# Altium PCB IOT_Fire_Alarm.PcbDoc
Units mil, origin at the board's own origin, x right, y up, seen from the top; angles counter-clockwise.
Board outline 4250 x 3345 mil, 2 copper layers (Top Layer, Bottom Layer); 48 components, 38 nets, 186 pads, 1 vias.
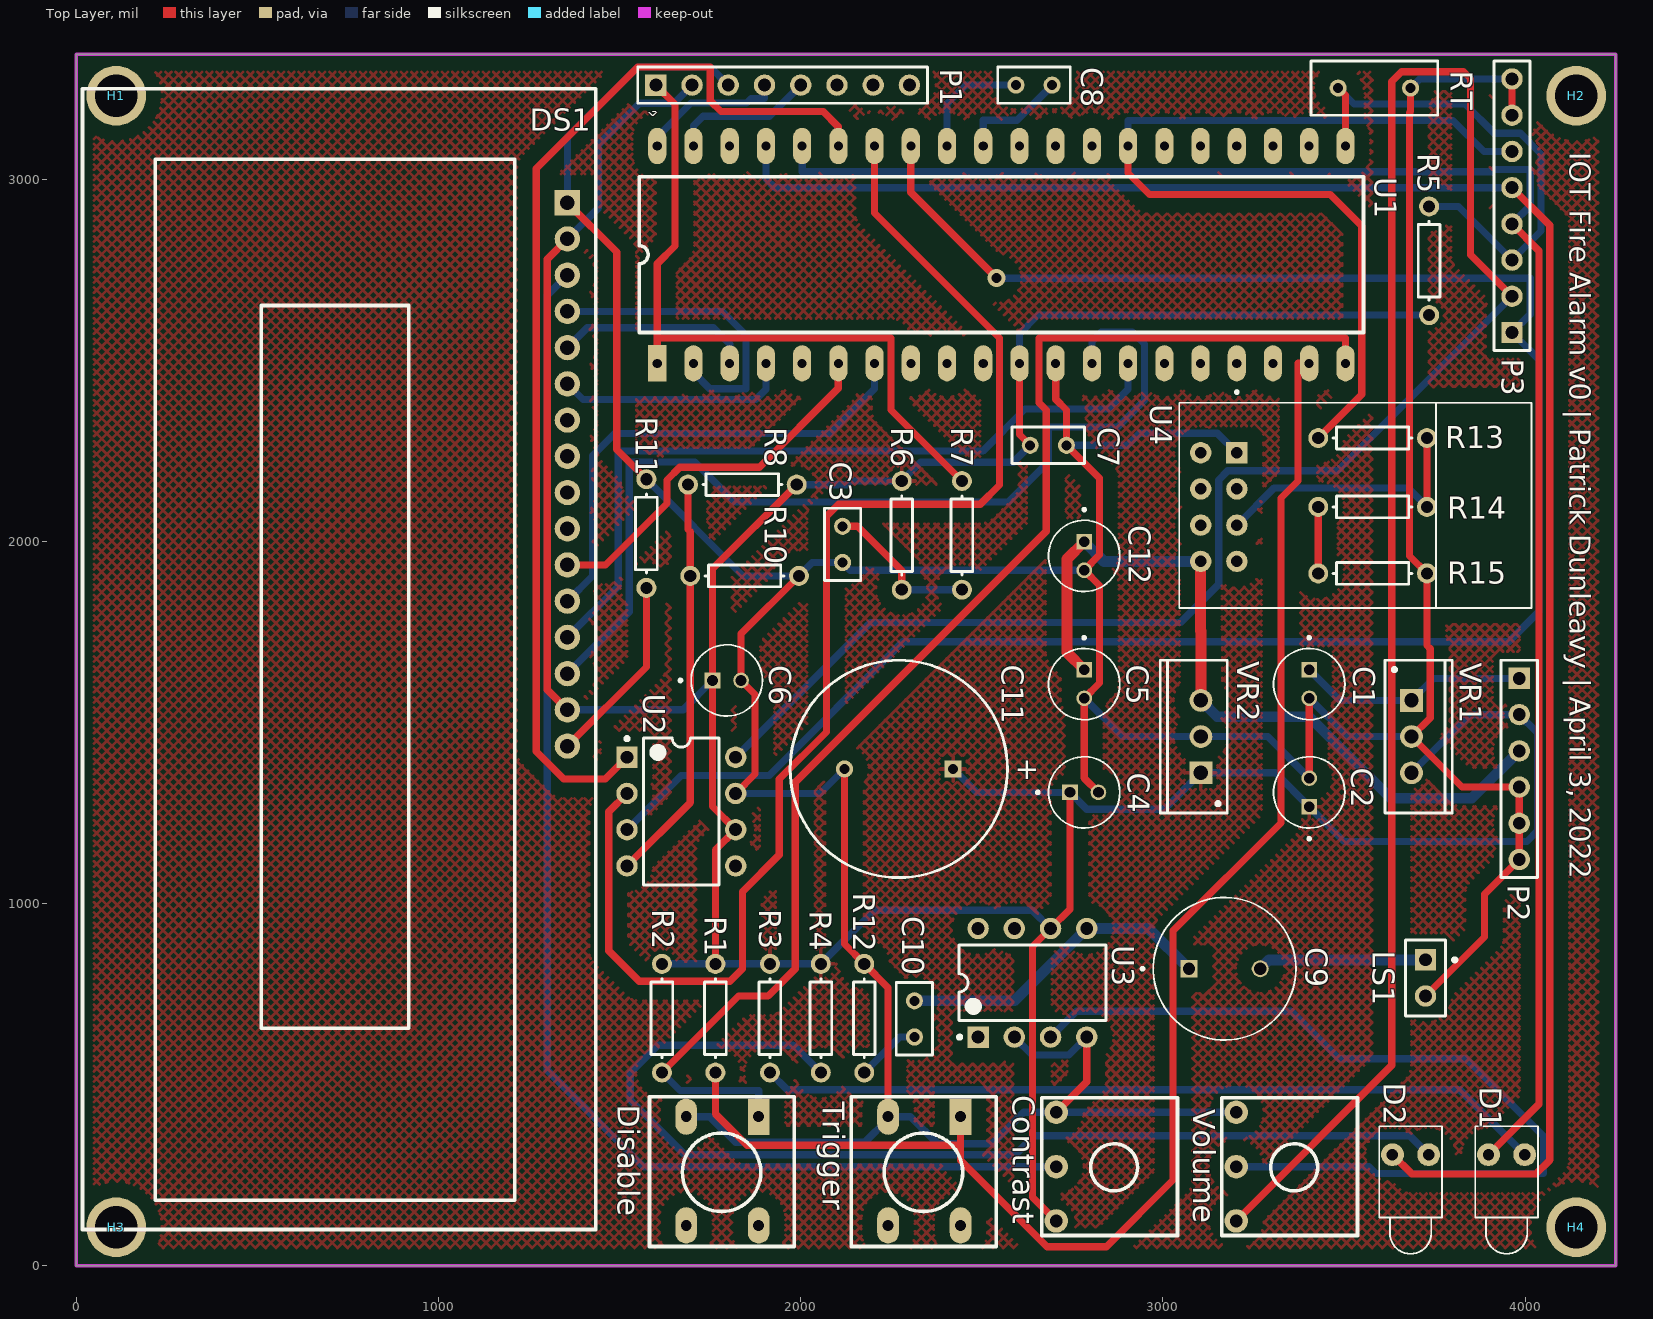
[diagram p0: Top Layer view]
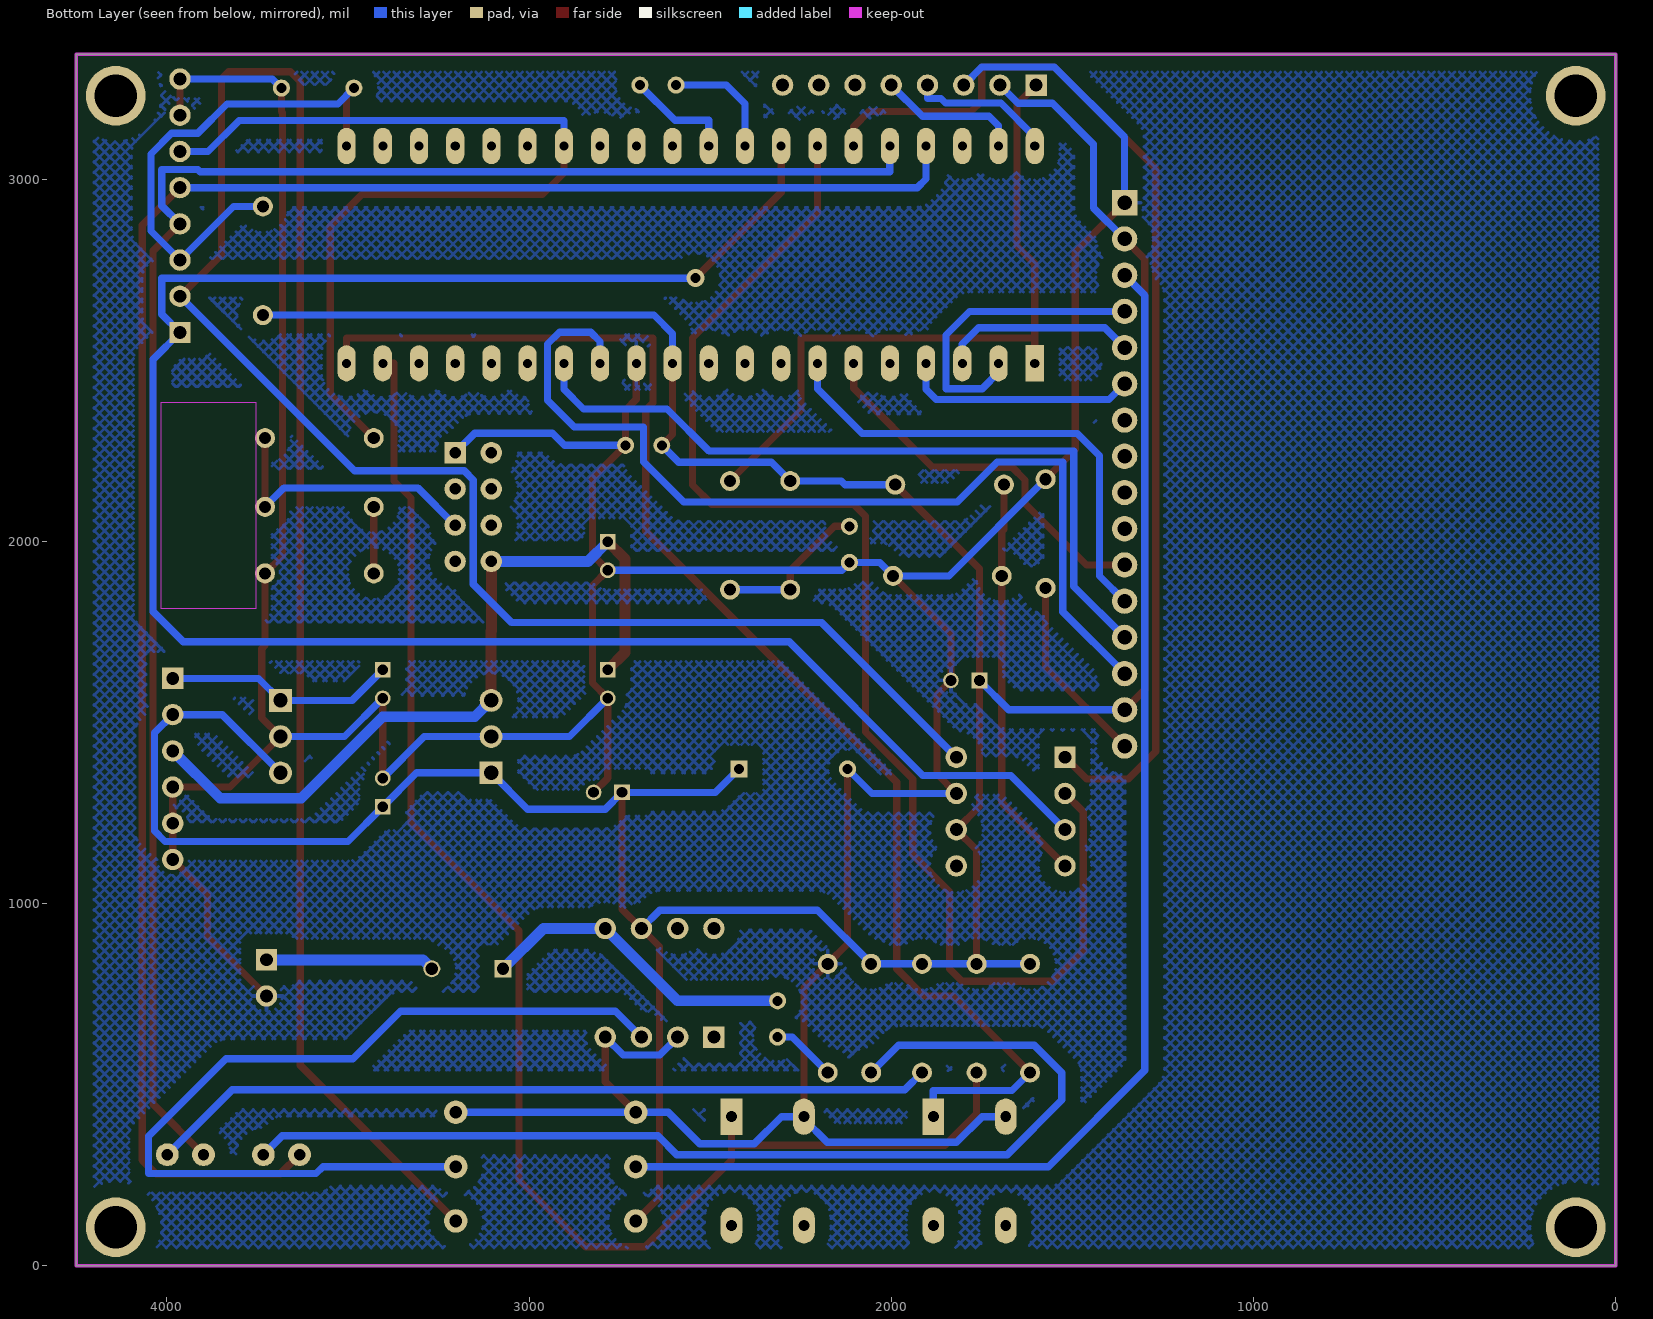
[diagram p1: Bottom Layer view, seen from below]

## Layer stack, top to bottom
Top Solder: solder mask 0.4, Solder Resist, Dk 3.5
Top Layer: signal copper 1.4
Dielectric 1: dielectric 12.6, FR-4, Dk 4.8
Bottom Layer: signal copper 1.4
Bottom Solder: solder mask 0.4, Solder Resist, Dk 3.5

## Board outline
0,0 4250,0 4250,3345 0,3345

## Design rules (kind name [scope] priority, off if disabled: settings)
Clearance Clearance_1 [InPolygon] p1: gap=40 ignorepadtopadclearanceinfootprint=FALSE
Clearance [All] p2: gap=10 ignorepadtopadclearanceinfootprint=FALSE except(0: Arc-Hole Track-Hole SMDPad-Hole THPad-Hole Via-Hole Fill-Hole Poly-Hole Region-Hole Text-Hole)
PolygonConnect [All] p1: connectstyle=Relief reliefconductorwidth=10 reliefentries=4 polygonreliefangle="90 Angle" airgapwidth=10
RoutingLayers [InNet('GND')] p1: top layer_v5=TRUE bottom layer_v5=TRUE
RoutingVias [All] p1: holewidth=28 width=50 viastyle="Through Hole" minholewidth=28 minwidth=50 maxholewidth=28 maxwidth=50
SolderMaskExpansion [All] p1: expansion=4 istentingtop=FALSE
Width "Schematic Width Constraint_2" [InNet('NetC9_N')] p1: maxlimit=30 minlimit=20 preferedwidth=30 minimp=50.000000 maximp=50.000000 favimp=50.000000
Width "Schematic Width Constraint_1" [InNet('NetC9_P')] p2: maxlimit=30 minlimit=20 preferedwidth=30 minimp=50.000000 maximp=50.000000 favimp=50.000000
Width "Schematic Width Constraint" [InNet('3V3')] p3: maxlimit=40 minlimit=20 preferedwidth=30 minimp=50.000000 maximp=50.000000 favimp=50.000000
Width [All] p4: maxlimit=20 minlimit=20 preferedwidth=20 minimp=50.000000 maximp=50.000000 favimp=50.000000
29 further rules are at their usual default settings.

## Components (designator, comment, footprint, x,y, rotation, side; value= is the part's Value field where it differs from the comment)
C1 "0.47uF" CAPPRD200W50D500H1500 3403.89,1606.31 r270 top
C2 "1uF" CAPPRD200W50D500H1500 3403.89,1307.3 r90 top
C3 "Cap" RAD-0.1 2115.58,1991.94 r90 top value="0.1 uF"
C4 "0.47uF" CAPPRD200W50D500H1500 2782.6,1307.3 r0 top
C5 "47uF" CAPPRD200W50D500H1500 2782.6,1606.31 r270 top
C6 "1uF" CAPPRD200W50D500H1500 1795.84,1616.37 r0 top
C7 "Cap" RAD-0.1 2683.66,2265.61 r180 top value=0.1uF
C8 "Cap" RAD-0.1 2644.15,3260 r180 top value=0.1uF
C9 "270uF" CAPPRD500W60D1000H1250 3170.22,820.33 r0 top
C10 "Cap" RAD-0.1 2313.89,681.94 r90 top value=0.1uF
C11 "Cap Pol1" RB7.6-15 2270.81,1371.94 r0 top value="1000 uF"
C12 "1uF" CAPPRD200W50D500H1500 2782.6,1960.05 r270 top
Contrast "RPot_3" "POT inline wide" 2705.2,374.01 r270 top value=10K
D1 "LED2" LED-1 3948.89,306.94 r270 top
D2 "LED2" LED-1 3683.69,306.94 r270 top
Disable "SW-PB" "SW PB" 1883.89,411.94 r270 top
DS1 "LCD 44780" "OLED 16x2" 1355.75,2935.24 r270 top
H1 "Hole 3mm" "Hole 3mm"#1 100.18,3245.6 r0 top
H2 "Hole 3mm" "Hole 3mm"#2 4141.25,3230.59 r0 top
H3 "Hole 3mm" "Hole 3mm"#3 110,105 r0 top
H4 "Hole 3mm" "Hole 3mm"#4 4140.29,106.85 r0 top
LS1 "Speaker" PIN2 3725,845 r270 top
P1 "Snap" HDR1X8 1600,3260 r0 top
P2 "Power" HDR1X6 3983.74,1621.94 r270 top
P3 "Debug" HDR1X8 3963.89,2576.94 r90 top
R1 "Res1" AXIAL-0.3 1764.37,683.83 r90 top value=1K
R2 "Res1" AXIAL-0.3 1616.76,683.83 r90 top value=1K
R3 "Res1" AXIAL-0.3 1915.02,683.83 r90 top value=2.2k
R4 "Res1" AXIAL-0.3 2055.5,683.83 r90 top value=2.2k
R5 "Res1" AXIAL-0.3 3735,2775 r270 top value=10K
R6 "Res1" AXIAL-0.3 2278.89,2016.94 r90 top value=10k
R7 "Res1" AXIAL-0.3 2445.15,2016.94 r90 top value=470
R8 "Res1" AXIAL-0.3 1838.89,2156.94 r180 top value=10K
R10 "Res1" AXIAL-0.3 1845,1905 r180 top value=470
R11 "Res1" AXIAL-0.3 1573.89,2021.94 r270 top value=1K
R12 "Res1" AXIAL-0.3 2175.39,683.83 r270 top value=10K
R13 "Res1" AXIAL-0.3 3578.89,2285.61 r180 top value=1K
R14 "Res1" AXIAL-0.3 3578.89,2095.54 r0 top value=1K
R15 "Res1" AXIAL-0.3 3578.89,1911.94 r180 top value=1K
RT "Res Thermal" RAD-0.2 3583.89,3251.94 r0 top (schematic designator RT1)
Trigger "SW-PB" "SW PB" 2441.2,411.94 r270 top
U1 "PIC18F47K40-I/P" DIP-40 1603.89,2491.94 r90 top
U2 "LT1661" DIP-8 1670.35,1254.37 r0 top
U3 "LM386N-1" DIP-8 2639.79,781.53 r90 top
U4 "ESP8266-01/ESP-01" XCVR_ESP8266-01/ESP-01 3531.4,2095.13 r270 top
Volume "RPot_3" "POT inline wide" 3202.32,374.01 r270 top value=10K
VR1 "LM7805CV" T03B 3686.42,1461.31 r270 top
VR2 "LM3940" T03B 3104.77,1461.31 r90 top

## Footprints (in the part's own frame and the unit in brackets; to place one, negate y for a bottom-side part, rotate by r counter-clockwise, add the part's x,y. Pads: shape width x height; smd on the part's side, far side on the other; paste and mask are expansions set on the pad)
AXIAL-0.3 [mm] "Axial Device, Thru-Hole; 2 Leads; 0.3 in Pin Spacing"
  round 1.4 hole 0.85: 1(-3.81,0) 2(3.81,0)
  silkscreen extent -2.77,-0.76 2.77,0.76
CAPPRD200W50D500H1500 [mm]
  round 1.1 hole 0.75: N(1,0)
  rect 1.1x1.1 hole 0.75: P(-1,0)
  silkscreen extent -3.35,-2.5 2.5,2.5, body extent -2.5,-2.5 2.5,2.5, height 15
CAPPRD500W60D1000H1250 [mm]
  round 1.2 hole 0.85: N(2.5,0)
  rect 1.2x1.2 hole 0.85: P(-2.5,0)
  silkscreen extent -5.85,-5 5,5, body extent -5,-5 5,5, height 12.5
DIP-8 [mm]
  rect 1.5x1.5 hole 0.9: 1(-3.81,3.81)
  round 1.5 hole 0.9: 2(-3.81,1.27) 3(-3.81,-1.27) 4(-3.81,-3.81) 5(3.81,-3.81) 6(3.81,-1.27) 7(3.81,1.27) 8(3.81,3.81)
  silkscreen extent -3.93,-5.15 2.65,5.23, body extent -3.6,-5.15 3.6,5.15, height 5.08
DIP-40 [mil]
  rect 100x50 hole 25: 1(0,0)
  oval 100x50 hole 25: 2(0,-100) 3(0,-200) 4(0,-300) 5(0,-400) 6(0,-500) 7(0,-600) 8(0,-700) 9(0,-800) 10(0,-900) 11(0,-1000) 12(0,-1100) 13(0,-1200) 14(0,-1300) 15(0,-1400) 16(0,-1500) 17(0,-1600) 18(0,-1700) 19(0,-1800) 20(0,-1900) 21(600,-1900) 22(600,-1800) 23(600,-1700) 24(600,-1600) 25(600,-1500) 26(600,-1400) 27(600,-1300) 28(600,-1200) 29(600,-1100) 30(600,-1000) 31(600,-900) 32(600,-800) 33(600,-700) 34(600,-600) 35(600,-500) 36(600,-400) 37(600,-300) 38(600,-200) 39(600,-100) 40(600,0)
  silkscreen extent 85,-1950 515,50
HDR1X6 [mm] "Connector; Header; 6 Position"
  rect 1.5x1.5 hole 0.9: 1(0,0)
  round 1.5 hole 0.9: 2(2.54,0) 3(5.08,0) 4(7.62,0) 5(10.16,0) 6(12.7,0)
  silkscreen extent -1.27,-1.27 13.97,1.27
HDR1X8 [mm] "Connector; Header; 8 Position"
  rect 1.5x1.5 hole 0.9: 1(0,0)
  round 1.5 hole 0.9: 2(2.54,0) 3(5.08,0) 4(7.62,0) 5(10.16,0) 6(12.7,0) 7(15.24,0) 8(17.78,0)
  silkscreen extent -1.27,-1.27 19.05,1.27
"Hole 3mm"#1 [mil]
  round 165 hole 118.11: 1(9.82,-15)
"Hole 3mm"#2 [mil]
  round 165 hole 118.11: 1(0,0)
"Hole 3mm"#3 [mil]
  round 165 hole 118.11: 1(0,1.85)
"Hole 3mm"#4 [mil]
  round 165 hole 118.11: 1(0.96,0)
LED-1 [mm] "LED; 2 Leads"
  round 1.6 hole 0.8: 1(0,1.27) 2(0,-1.27)
  silkscreen extent -2,-2.2 6.95,2.2
"OLED 16x2" [mil]
  rect 70x70 hole 40: 1(0,0)
  round 70 hole 40: 2(100,0) 3(200,0) 4(300,0) 5(400,0) 6(500,0) 7(600,0) 8(700,0) 9(800,0) 10(900,0) 11(1000,0) 12(1100,0) 13(1200,0) 14(1300,0) 15(1400,0) 16(1500,0)
  silkscreen extent -315,-1339 2835,79
PIN2 [mm] "Photosensitive Diode; 2 Leads"
  rect 1.5x1.5 hole 0.9: 1(0,0)
  round 1.5 hole 0.9: 2(2.54,0)
  silkscreen extent -1.4,-1.4 3.94,2.18
"POT inline wide" [mil]
  round 65 hole 35: 1(-50,0) 2(100,0) 3(250,0)
  silkscreen extent -90,-40 290,335
RAD-0.1 [mm] "Radial Cap, Thru-Hole; 2 Leads; 0.1 in Pin Spacing"
  round 1.2 hole 0.7: 1(-1.27,0) 2(1.27,0)
  silkscreen extent -2.54,-1.27 2.54,1.27
RAD-0.2 [mm] "Radial Cap, Thru-Hole; 2 Leads; 0.2 in Pin Spacing"
  round 1.2 hole 0.7: 1(-2.54,0) 2(2.54,0)
  silkscreen extent -4.44,-1.91 4.45,1.9
RB7.6-15 [mm] "Polarized Capacitor (Radial); 2 Leads"
  rect 1.2x1.2 hole 0.7: 1(3.81,0)
  round 1.2 hole 0.7: 2(-3.81,0)
  silkscreen extent -7.62,-7.62 7.62,7.62
"SW PB" [mil]
  rect 100x60 hole 30: 1(0,0)
  oval 100x60 hole 30: 2(0,-200) 3(300,-200) 4(300,0)
  silkscreen extent -55,-302 358,98
T03B [mm]
  rect 1.6x1.6 hole 1: 1(-2.54,0)
  round 1.6 hole 1: 2(0,0) 3(2.54,0)
  silkscreen extent -5.35,-1.85 5.35,2.85, body extent -5.4,-1.9 5.4,2.9, height 19.4
XCVR_ESP8266-01/ESP-01 [mm]
  rect 1.5x1.5 hole 0.8: 1(-3.81,-8.31)
  round 1.5 hole 0.8: 2(-1.27,-8.31) 3(1.27,-8.31) 4(3.81,-8.31) 5(-3.81,-10.85) 6(-1.27,-10.85) 7(1.27,-10.85) 8(3.81,-10.85)
  Keep-Out Layer region: 7.09,5.65 -7.31,5.65 -7.31,12.35 7.09,12.35
  Keep-Out Layer region: 7.09,5.65 -7.31,5.65 -7.31,12.35 7.09,12.35
  silkscreen extent -8.16,-12.35 7.09,12.35, body extent -7.2,-12.35 7.2,12.35, height 6.5

## Part data
C1 C2 C4 C5 C6 C12: library part EEUEB1J1R0, "1F 63V Aluminum Electrolytic Capacitors Radial, Can 5000 Hrs @ 105C", Package="RADIAL-2 Panasonic", Availability="Not in stock", Check_prices=https://www.snapeda.com/parts/EEU-EB1J1R0/Panasonic/view-part/6221748/?ref=eda, MF="Panasonic Electronic Components", MP=EEU-EB1J1R0, Price=None, SnapEDA_Link=https://www.snapeda.com/parts/EEU-EB1J1R0/Panasonic/view-part/6221748/?ref=snap
C3 C7 C8 C10: "Capacitor", LatestRevisionDate=17-Jul-2002, LatestRevisionNote="Re-released for DXP Platform.", PackageDescription="Radial Cap, Thru-Hole; 2 Leads; 0.3 in Pin Spacing", PackageReference=RAD-0.3, Published=8-Jun-2000, Publisher="Altium Limited"
C9: library part EEUFC1J101, "Capacitor; Aluminum Electrolytic; Radial Al Electrolytic Cap; 100uF 63V", Package="RADIAL-2 Panasonic", Availability="In Stock", Check_prices=https://www.snapeda.com/parts/EEU-FC1J101/Panasonic%20Electronic%20Components/view-part/494707/?ref=eda, MF="Panasonic Electronic", MP=EEU-FC1J101, Price=None, SnapEDA_Link=https://www.snapeda.com/parts/EEU-FC1J101/Panasonic%20Electronic%20Components/view-part/494707/?ref=snap
C11: "Polarized Capacitor (Radial)", LatestRevisionDate=17-Jul-2002, LatestRevisionNote="Re-released for DXP Platform.", PackageDescription="Polarized Capacitor (Radial); 2 Leads", PackageReference=RB7.6-15, Published=8-Jun-2000, Publisher="Altium Limited"
Contrast Volume: library part RPot, "Potentiometer", LatestRevisionDate=17-Jul-2002, LatestRevisionNote="Re-released for DXP Platform.", Published=8-Jun-2000, Publisher="Altium Limited", Set Position=0.5, Sim Note="Enter the Resistance value and the set point into parameter fields."
D1 D2: "Typical RED, GREEN, YELLOW, AMBER GaAs LED", LatestRevisionDate=17-Jul-2002, LatestRevisionNote="Re-released for DXP Platform.", PackageDescription="SM LED; 2 Flat Leads", PackageReference=3.2X1.6X1.1, PackageVersion=Feb-2002, Published=8-Jun-2000, Publisher="Altium Limited"
Disable Trigger: "DIGIKEY SW400-ND", LatestRevisionDate=17-Jul-2002, LatestRevisionNote="Re-released for DXP Platform.", Published=24-Mar-1999, Publisher="Altium Limited"
LS1: "Loudspeaker", LatestRevisionDate=17-Jul-2002, LatestRevisionNote="Re-released for DXP Platform.", PackageReference=PIN2, Published=24-Mar-1999, Publisher="Altium Limited"
P1 P3: library part "Header 8", "Header, 8-Pin", LatestRevisionDate=17-Jul-2002, LatestRevisionNote="Re-released for DXP Platform.", Publisher="Altium Limited"
P2: library part "Header 6", "Header, 6-Pin", LatestRevisionDate=17-Jul-2002, LatestRevisionNote="Re-released for DXP Platform.", Publisher="Altium Limited"
R1 R2 R3 R4 R5 R6 R7 R8 R10 R11 R12 R13 R14 R15: "Resistor", LatestRevisionDate=17-Jul-2002, LatestRevisionNote="Re-released for DXP Platform.", PackageDescription="Axial Device, Thru-Hole; 2 Leads; 0.3 in Pin Spacing", PackageReference=AXIAL-0.3, Published=8-Jun-2000, Publisher="Altium Limited"
RT: "Thermistor", Code_IPC=RESC2012, LatestRevisionDate=29-May-2009, LatestRevisionNote="IPC-7351 Footprint Added.", PackageDescription="Chip Resistor 0805 Case Size", PackageReference=6-0805, PackageVersion=Mar-2003, Published=24-Mar-1999, Publisher="Altium Limited"
U1: library part PIC18F4620-I/P_1, "Enhanced Flash Microcontroller with 10-Bit A/D and nanoWatt Technology, 64K Flash, 40-Pin PDIP, Industrial Temperature Range", ComponentLink1Description="Manufacturer URL", ComponentLink1URL=http://www.microchip.com/, ComponentLink2Description=Datasheet, ComponentLink2URL=http://ww1.microchip.com/downloads/en/DeviceDoc/39626e.pdf, ComponentLink3Description="Package Specification", ComponentLink3URL=http://www.microchip.com/stellent/groups/techpub_sg/documents/packagingspec/en012702.pdf, DatasheetVersion="revE, May-2008", PackageDescription="40-Lead Plastic Dual In-Line (P) - 600 mil Body [PDIP]", PackageReference=PDIP600-P40, PackageVersion="revBB, Aug-2009"
U3: "Low-Voltage Audio Power Amplifier", PackageDocument=Sep-1997, DatasheetDocument=Sep-1997, PackageReference=N08E, Published=15-Apr-2002, Publisher="Altium Limited"
U4: "MakerFocus 4pcs ESP8266 ESP-01 Serial Wireless WiFi Transceiver Receiver Module 1MB SPI Flash DC3.0-3.6V Internet of Things WiFi Module Board Compatible with Ar duino", Package="Non-Standard AI-Thinker", Availability="Not in stock", Check_prices=https://www.snapeda.com/parts/ESP8266-01/ESP-01/AI-Thinker/view-part/?ref=eda, MF=AI-Thinker, MP=ESP8266-01/ESP-01, Price=None, SnapEDA_Link=https://www.snapeda.com/parts/ESP8266-01/ESP-01/AI-Thinker/view-part/?ref=snap
VR1 VR2: library part "Volt Reg", "Voltage Regulator", LatestRevisionDate=29-May-2009, LatestRevisionNote="IPC-7351 Footprint Added.", PackageDescription="3-Pin Transistor Outline Package 2.54 mm Pitch, 15.1 mm Lead Span", PackageReference=D2PAK, Published=24-Mar-1999, Publisher="Altium Limited"

## Via types
v1: diameter 50, hole 28, Top Layer to Bottom Layer, 1 vias

## Nets (pads, with @x,y where several pads share a name; then routed paths per layer and width w, separated by ;. In a path a pad name is that pad's centre, name@x,y a point inside that pad or via, vN(x,y) a via of type N, cw(c..) or ccw(c..) an arc to the next point about the centre after c; other vN are vias at no path point)
3V3: C5.P C12.P P2.3 U4.8 VR2.3 | length 2166.5
  Top Layer w30: C5.P 2735,1693.28 2735,1951.82 C12.P ; U4.8 3104.24,1752.54 3104.77,1752 VR2.3
  Bottom Layer w30: C12.P 2836.89,1945.13 U4.8 ; VR2.3 3150.08,1516 3404,1516 3629,1291 3852.8,1291 P2.3
5V: C2.P C4.P C6.P C7.2 C11.1 Contrast.3 DS1.2 DS1.15 P1.2 P2.2 R1.2 R2.2 R3.2 R4.2 R5.2 R6.2 R8.1 U1.11 U2.6 U3.6 VR1.3 VR2.1 | length 10940.3
  Top Layer w20: DS1.15 1300,1590.99 1300,2779.48 DS1.2 ; R1.2 1764.37,1148.38 U2.6 1756.47,1268.25 C6.P 1756.47,1924.52 R8.1 ; U1.11 2603.89,2295.38 C7.2 ; Contrast.3 2640,189.21 2640,881.74 U3.6 2743.23,984.97 C4.P
  Bottom Layer w20: DS1.15 1675.34,1535.24 C6.P ; DS1.2 1442,2921.48 1442,3097 1555,3210 1650,3210 P1.2 ; R2.2 R1.2 R3.2 R4.2 2203.68,982 2639.32,982 U3.6 ; R8.1 2128,2156.94 2138,2166.94 R6.2 2330.95,2219 2587.06,2219 C7.2 ; C11.1 2485.45,1307.3 C4.P 2789.53,1261 3004.46,1261 VR2.1 3310.51,1361.31 C2.P 3499.82,1172 4005,1172 4034,1201 4034,1471.67 P2.2 3847.05,1521.94 VR1.3 ; U1.11 2603.89,2573.89 2655,2625 R5.2
9V: C1.P P2.1 VR1.1 | length 639.9
  Bottom Layer w20: C1.P 3488.26,1561.31 VR1.1 3747.05,1621.94 P2.1
/CS: U1.35 U2.1 | length 3042.6
  Top Layer w20: U2.1 1459.99,1344 1346,1344 1270,1420 1270,3030 1550,3310 1750,3310 1750,3217 1780,3187 2061.89,3187 2103.89,3145 U1.35
ADC: P3.3 R5.1 RT.1 U1.21 | length 1420.2
  Top Layer w20: RT.1 3503.89,3231.94 U1.21
  Bottom Layer w20: RT.1 3527.83,3208 3834,3208 3915,3127 3987,3127 4044,3070 4044,2857.05 P3.3 3815.83,2925 R5.1
Disable: Disable.1 R2.1 U1.20 | length 3799.9
  Top Layer w20: R2.1 1827.93,745 1910,745 1985,820 1985,1335 2678,2028 2678,2363 2658,2383 2658,2562 3503.89,2562 U1.20
  Bottom Layer w20: R2.1 1666.59,484 1883.89,484 Disable.1
Enable: R1.1 Trigger.1 U1.19 | length 4137.6
  Top Layer w20: R1.1 1764.37,420 1851.37,333 2441.2,333 ; Trigger.1 2441.2,333 ; U1.19 3403.89,2492 3373,2492 3373,2167 3326,2120 3326,1223 3028,925 3028,237 2844,53 2680,53 2441.2,291.8 2441.2,333
GND: C1.N C2.N C3.1 C4.N C5.N C6.N C7.1 C11.2 C12.N Contrast.1 Disable.2 DS1.1 LS1.2 P1.3 P2.4 P2.5 P2.6 P3.7 P3.8 R10.1 R11.1 R12.1 R15.1 RT.2 Trigger.2 U1.12 U2.7 U3.2 U3.4 U4.1 Volume.1 VR1.2 VR2.2 | length 13434
  Top Layer w20: DS1.1 1492,2798.99 1492,2253.83 R11.1 ; U2.7 1874,1358.01 1874,1577.58 C6.N 1835.21,1745.21 R10.1 ; C11.2 2120.81,888.41 R12.1 2241.2,768.01 Trigger.2 ; U1.12 2703.89,2392.77 2733.66,2363 C7.1 2825,2174.27 2825,1963.08 C12.N 2825,1878.28 2825,1609.34 C5.N 2782.6,1346.67 C4.N ; Contrast.1 2789.79,508.6 U3.4 ; C2.N C1.N ; RT.2 3683.89,3186.89 3681,3184 3681,1959.83 R15.1 3728.89,1713.11 3738,1704 3738,1512.89 VR1.2 3825.79,1321.94 P2.4 P2.5 P2.6 3888,1026.2 3888,908 LS1.2 ; P3.7 P3.8
  Bottom Layer w20: DS1.1 1355.75,3115.75 1550,3310 1750,3310 P1.3 ; R11.1 1840.83,1905 R10.1 2031.94,1941.94 C3.1 2136.84,1920.68 C12.N ; Disable.2 1749.06,411.94 1820,341 2176.78,341 2241.2,405.42 Trigger.2 2303.06,411.94 2378,337 2528.99,337 2616,424.01 Contrast.1 Volume.1 ; U2.7 2053.24,1304.37 C11.2 ; U3.2 2639.32,582 2740.26,582 U3.4 ; C7.1 2902,2265.61 2935.39,2299 3150.36,2299 U4.1 ; C5.N 2888.23,1461.31 VR2.2 3289.25,1461.31 C2.N ; C1.N 3509.52,1461.31 VR1.2 ; RT.2 3708.89,3276.94 P3.8
LCD_DB4: DS1.11 U1.6 | length 1057.2
  Top Layer w20: DS1.11 1461.24,1935.24 1631,2105 1631,2170 1666,2205 1885.89,2205 2103.89,2423 U1.6
LCD_DB5: DS1.12 U1.7 | length 1355.7
  Bottom Layer w20: DS1.12 1425,1904.48 1425,2236.73 1486.27,2298 2079.89,2298 2203.89,2422 U1.7
LCD_DB6: DS1.13 U1.14 | length 2122.6
  Bottom Layer w20: DS1.13 1496.33,1875.81 1496.33,2249.5 2502.5,2249.5 2619,2366 2849.89,2366 2903.89,2420 U1.14
LCD_DB7: DS1.14 U1.13 | length 2680.5
  Bottom Layer w20: DS1.14 1526.33,1805.81 1526.33,2219.5 1707.5,2219.5 1818,2109 2573,2109 2684,2220 2684,2316 2875,2316 2949,2390 2949,2545 2916,2578 2830,2578 2803.89,2551.89 U1.13
LCD_E: DS1.6 U1.4 | length 649.6
  Bottom Layer w20: DS1.6 1399.05,2391.94 1875.83,2391.94 1903.89,2420 U1.4
LCD_RS: DS1.4 U1.2 | length 857
  Bottom Layer w20: DS1.4 1783.76,2635.24 1849,2570 1849,2421.94 1748.95,2421.94 1703.89,2467 U1.2
LCD_RW: DS1.5 U1.3 | length 542.5
  Bottom Layer w20: DS1.5 1410.52,2590 1758.89,2590 1803.89,2545 U1.3
MCLR: P1.1 R7.2 U1.1 | length 1931.8
  Top Layer w20: P1.1 1653,3207 1653,2816 1603.89,2766.89 1603.89,2562 ; U1.1 1603.89,2562 ; R7.2 2249,2363.09 2249,2562 1603.89,2562
NetC3_2: C3.2 R6.1 R7.1 | length 433.1
  Top Layer w20: C3.2 2156.95,2041.94 2278.89,1920 R6.1
  Bottom Layer w20: R6.1 R7.1
NetC8_1: C8.1 U1.31 | length 301.4
  Bottom Layer w20: U1.31 2503.89,3162.89 2597.04,3162.89 C8.1
NetC8_2: C8.2 U1.32 | length 328.4
  Bottom Layer w20: U1.32 2403.89,3208.89 2455,3260 C8.2
NetC9_N: C9.N LS1.1 | length 466.6
  Bottom Layer w30: C9.N 3293.32,845 LS1.1
NetC9_P: C9.P C10.2 U3.5 | length 886.6
  Bottom Layer w30: C10.2 2590.2,731.94 U3.5 2960.6,931.53 C9.P
NetC10_1: C10.1 R12.2 | length 179.1
  Bottom Layer w20: R12.2 2273.5,631.94 C10.1
NetContrast_2: Contrast.2 DS1.3 | length 3733.7
  Bottom Layer w20: DS1.3 1300,2679.48 1300,540 1565.99,274.01 Contrast.2
NetD1_1: D1.1 R3.1 | length 2177.8
  Bottom Layer w20: R3.1 1962.85,486 3819.83,486 D1.1
NetD2_1: D2.1 R4.1 | length 2974.5
  Bottom Layer w20: R4.1 1980.33,609 1605,609 1529,533 1529,458 1680,307 2592,307 2644,359 3681.63,359 D2.1
NetDS1_16: DS1.16 R11.2 | length 527.1
  Top Layer w20: DS1.16 1573.89,1653.37 R11.2
NetR8_2: R8.2 R10.2 U2.4 | length 1127.4
  Top Layer w20: U2.4 1695,1279.01 R10.2 1695,2027 1688.89,2033.11 R8.2
NetR13_1: R13.1 R14.2 U4.3 | length 779.1
  Top Layer w20: R14.2 R13.1
  Bottom Layer w20: U4.3 3307.11,2148 3676.43,2148 R14.2
NetR14_1: R14.1 R15.2 | length 183.6
  Top Layer w20: R15.2 R14.1
NetU3_3: U3.3 Volume.2 | length 2493.3
  Bottom Layer w20: U3.3 2761.26,703 3355,703 3486,572 3837,572 4051,358 4051,255 3588,255 3568.99,274.01 Volume.2
PGC: P1.5 U1.39 | length 398.4
  Bottom Layer w20: U1.39 1703.89,3147.7 1730,3173.81 1913.81,3173.81 P1.5
PGD: P1.4 U1.40 | length 402.1
  Bottom Layer w20: U1.40 1603.89,3117 1697.36,3210.47 1850,3210.47 1862.53,3223 1900,3223 P1.4
SCK: U1.34 U2.2 | length 3811.7
  Top Layer w20: U2.2 1470,1254.01 1470,870 1554,786 1805,786 1839,820 1839,1033 1941,1135 1941,1344 2071,1474 2071,2070 2104,2103 2496,2103 2549,2156 2549,2562 2203.89,2907.11 U1.34
SPI_SDO: P3.1 U1.33 U2.3 | length 5675.5
  Top Layer w20: U1.33 2303.89,2964 v1(2540.89,2727)
  Bottom Layer w20: U2.3 1669.99,1354 1913,1354 2282,1723 3955,1723 4038,1806 4038,2502.83 P3.1 4014,2627.05 4014,2727 v1(2540.89,2727)
STATUS: D1.2 P3.4 U1.36 | length 4912.7
  Top Layer w20: D1.2 4038,446.05 4038,2802.83 P3.4
  Bottom Layer w20: U1.36 2003.89,3021 3908,3021 3914,3027 4014,3027 4014,2927.05 P3.4
STATUS_ESP: P3.6 R13.2 U1.27 | length 2580.9
  Top Layer w20: U1.27 2903.89,3017.11 2963,2958 3462,2958 3549,2871 3549,2405.72 R13.2
  Bottom Layer w20: U1.27 2903.89,3162 3801.12,3162 3886.18,3076.94 P3.6
STATUS_MID: D2.2 P3.5 U1.37 | length 5360.9
  Top Layer w20: D2.2 3686.63,254 4030,254 4068,292 4068,2872.83 P3.5
  Bottom Layer w20: U1.37 1903.89,3001 1927.95,2976.94 P3.5
VDAC: P3.2 U2.8 Volume.3 | length 7048
  Top Layer w20: Volume.3 3632,553.69 3632,3270 3659,3297 3830,3297 3849,3278 3849,2791.83 P3.2
  Bottom Layer w20: U2.8 2191.99,1776 3048,1776 3154,1882 3154,2170 3179,2195 3481.95,2195 P3.2
pads on no net: Disable.3 Disable.4 DS1.7 DS1.8 DS1.9 DS1.10 H1.1 H2.1 H3.1 H4.1 P1.6 P1.7 P1.8 Trigger.3 Trigger.4 U1.5 U1.8 U1.9 U1.10 U1.15 U1.16 U1.17 U1.18 U1.22 U1.23 U1.24 U1.25 U1.26 U1.28 U1.29 U1.30 U1.38 U2.5 U3.1 U3.7 U3.8 U4.2 U4.4 U4.5 U4.6 U4.7

## Polygon pours and split planes (outlines as drawn)
GND on Bottom Layer "GND_L02_P000" (hatched 45Degree grid 20 track 8, pour order 0): 0,0 0,3345 4250,3345 4250,0
5V on Top Layer "5V_L02_P-001" (hatched 45Degree grid 20 track 8, pour order 3): 0,0 0,3345 4250,3345 4250,0

## Keep-outs
Keep-Out Layer:
  lines w10: 0,0 4250,0 4250,20 4250,3115 4250,3345 0,3345 0,3310 0,0

## Silkscreen, mask and mechanical layers (free items; w line width, h text height)
Top Overlay:
  text "^" at 1609.03,3204.84 h30 r180
  text "-" at 1589.23,3175.21 h30
  text "IOT Fire Alarm v0 | Patrick Dunleavy | April 3, 2022" at 4122.9,3075.08 h57 r270

## Text inside footprints (layer, text, board x,y; h text height)
C11: Top Overlay "+" at 2590.96,1342.93 h59.06